# Altium PCB PCB1.PcbDoc
Units mm, origin at the board's own origin, x right, y up, seen from the top; angles counter-clockwise.
Board outline 89.92 x 60.07 mm, 2 copper layers (Top Layer, Bottom Layer); 73 components, 41 nets, 180 pads, 28 vias.
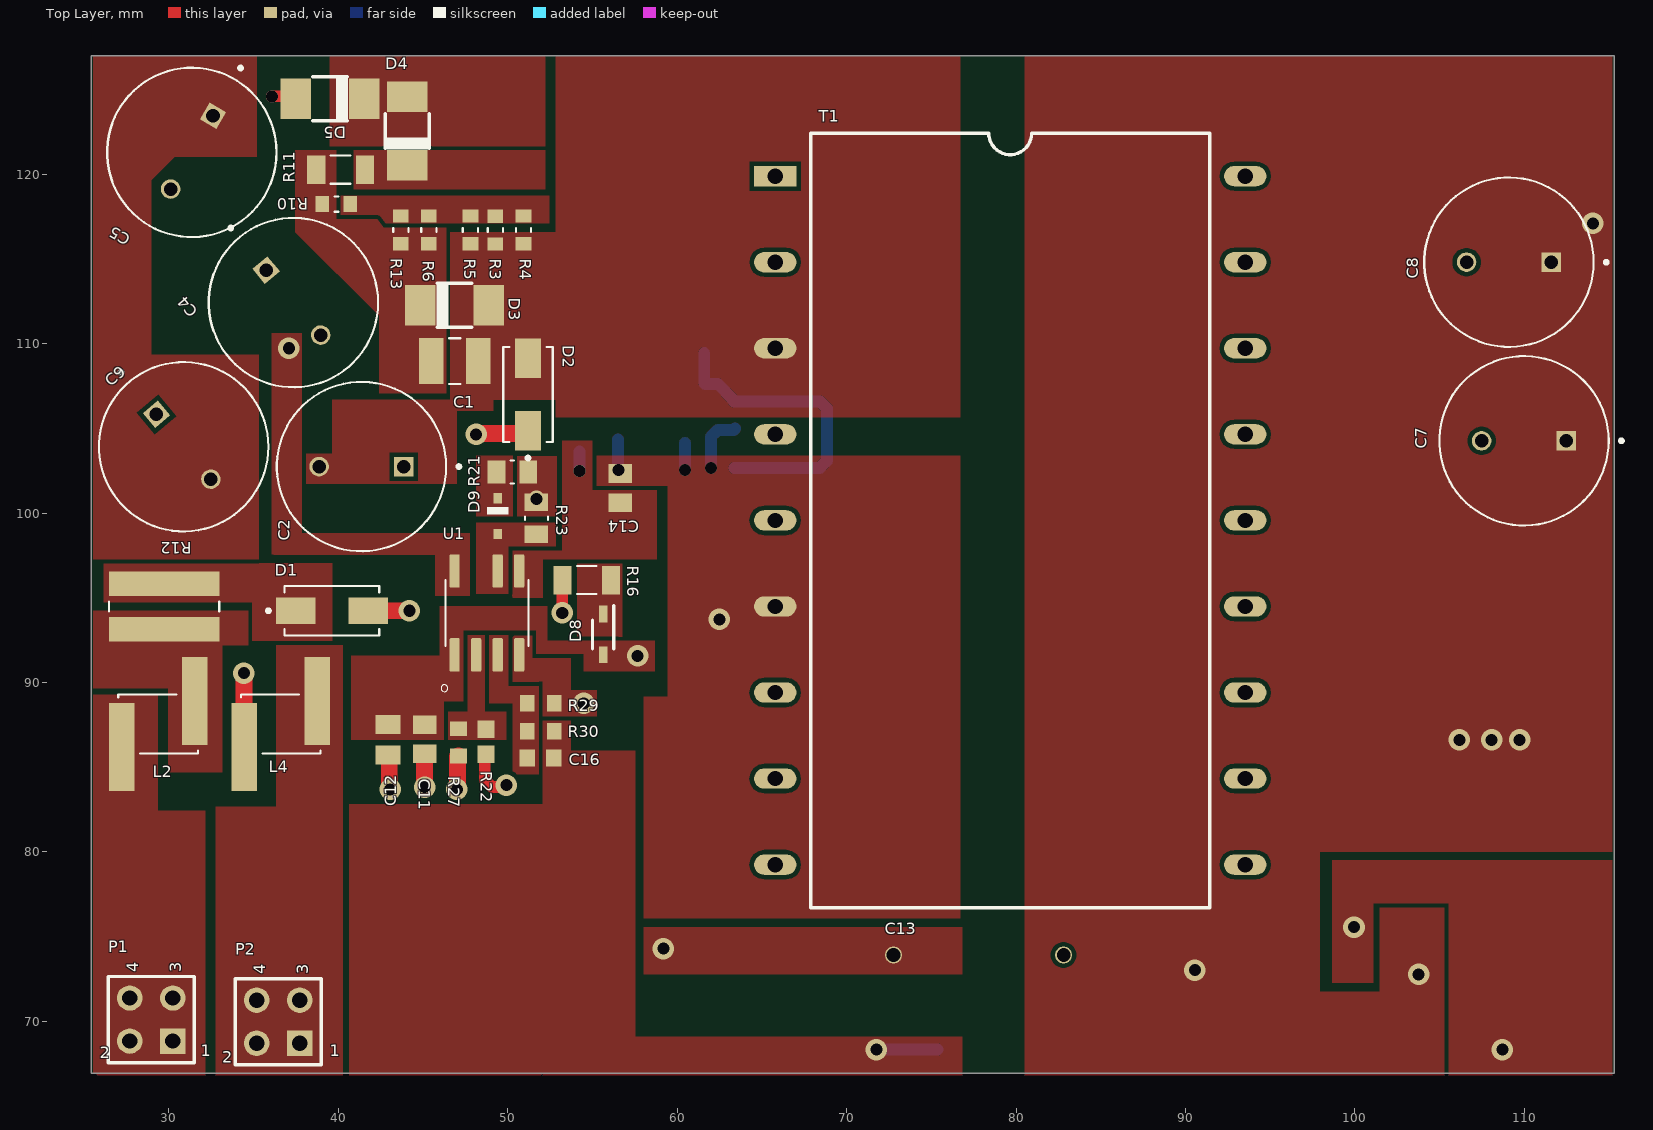
[diagram p0: Top Layer view]
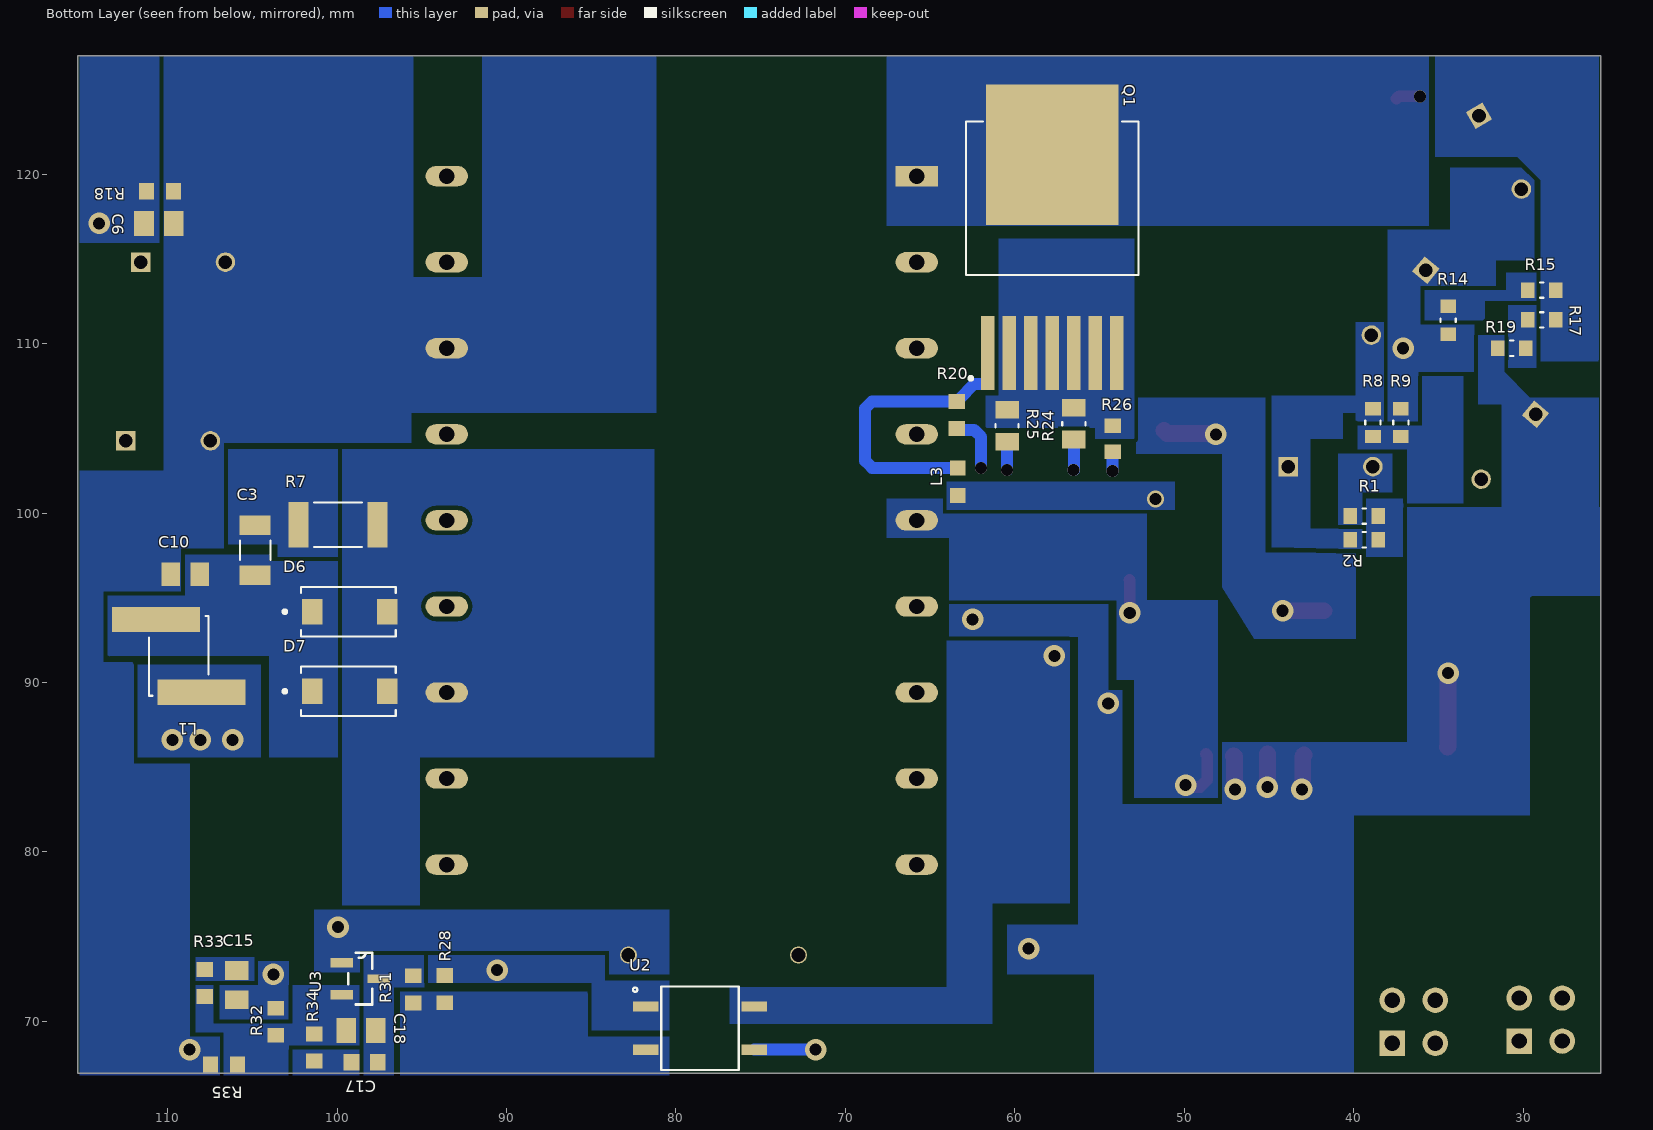
[diagram p1: Bottom Layer view, seen from below]

## Layer stack, top to bottom
Top Solder: solder mask 0.0102, Solder Resist, Dk 3.5
Top Layer: signal copper 0.0356
Dielectric 1: dielectric 0.32, FR-4, Dk 4.8
Bottom Layer: signal copper 0.0356
Bottom Solder: solder mask 0.0102, Solder Resist, Dk 3.5

## Board outline
115.316,127 115.316,66.929 25.4,66.929 25.4,127

## Design rules (kind name [scope] priority, off if disabled: settings)
Clearance [All] p1: gap=0.254 ignorepadtopadclearanceinfootprint=FALSE except(0: Arc-Hole Track-Hole SMDPad-Hole THPad-Hole Via-Hole Fill-Hole Poly-Hole Region-Hole Text-Hole)
PolygonConnect [All] p1: connectstyle=Direct reliefconductorwidth=0.254 reliefentries=4 polygonreliefangle="90 Angle" airgapwidth=0.254
RoutingVias [All] p1: holewidth=0.711 width=1.27 viastyle="Through Hole" minholewidth=0.711 minwidth=1.27 maxholewidth=0.711 maxwidth=1.27
SolderMaskExpansion [All] p1: expansion=0.102 istentingtop=FALSE
Width [All] p1: maxlimit=10 minlimit=0.254 preferedwidth=0.254 minimp=50.000000 maximp=50.000000 favimp=50.000000
30 further rules are at their usual default settings.

## Components (designator, comment, footprint, x,y, rotation, side; value= is the part's Value field where it differs from the comment)
C1 "0.033u 630v" "0.33u 630V c" 46.863,108.966 r0 top
C2 "15Uf" 15uf 41.344,102.766 r180 top
C3 "LEC017" LEC017 104.902,97.917 r270 bottom
C4 "15Uf" 15uf 37.338,112.395 r310 top
C5 "15Uf" 15uf 31.32,121.287 r240 top
C6 "1uF 50V" C-0805 110.617,117.094 r180 bottom
C7 "470uF 25V" "470uF 25V" 109.982,104.267 r180 top
C8 "470uF 25V" "470uF 25V" 109.093,114.808 r180 top
C9 "15Uf" 15uf 30.861,103.886 r310 top
C10 "GRM21BR71H105KA12L" CAPC2012X135N 108.966,96.393 r0 bottom
C11 "0.1u 25V" CAPC2012X135N 45.088,86.647 r270 top
C12 "4.7u 25V" "4.7u 25V" 42.926,86.614 r270 top
C13 "1000pF 20% 1.25kV" "CAP Fılm 1000pF 20% 450V" 73.533,73.914 r0 top
C14 "0.1u 25V" CAPC2012X135N 56.642,101.473 r90 top
C15 "0.1u 25V" CAPC2012X135N 105.918,72.136 r270 bottom
C16 "0.033uF 60V" C-0603 51.939,85.535 r0 top
C17 "0.033uF 50V" C-0603 98.364,67.577 r180 bottom
C18 "1000pF 50V 10%" C-0805 98.679,69.469 r180 bottom
D1 "S1M-13-F" S1M-13F 39.492,94.107 r0 top
D2 "S1M-13-F" S1M-13F 51.317,106.872 r90 top
D3 "P6SMB350A" P6SMB350A 46.863,112.395 r0 top
D4 "ES1M" ES1M 44.069,122.555 r90 top
D5 "ES1M" ES1M 39.497,124.46 r180 top
D6 "STPS3150UF" STPS3150UF 99.463,94.053 r180 bottom
D7 "STPS3150UF" STPS3150UF 99.463,89.354 r180 bottom
D8 "BAS21HT1" BAS21HT1 55.626,92.837 r270 top
D9 "75V 150mA" "75V 150mA" 49.403,99.822 r270 top
L1 "SDR0805-3R3ML" 8200uH 109.347,91.567 r270 bottom
L2 "8200uH" 8200uH 29.36,87.551 r180 top
L3 "Ferrite Bead 750ohm" "Ferrite Bead 750ohm" 63.373,101.854 r90 bottom
L4 "8200uH" 8200uH 36.601,87.551 r0 top
P1 "Header 2X2" HDR2X2 30.226,68.834 r90 top
P2 "Header 2X2" HDR2X2 37.719,68.707 r90 top
Q1 "1700V 5.3A mosfet" "1400V 5.3A Mosfet" 57.658,117.812 r180 bottom
R1 "2.2M R" 232K 39.37,99.949 r0 bottom
R2 "2.2M R" 232K 39.37,98.552 r0 bottom
R3 "232K r" 232K 49.139,116.7 r270 top
R4 "232K r" 232K 50.8,116.713 r270 top
R5 "232K r" 232K 47.667,116.714 r270 top
R6 "232K r" 232K 45.466,116.713 r90 top
R7 "LER022-2000" LER022 99.822,99.187 r0 bottom
R8 "2.2M R" 232K 38.989,105.341 r270 bottom
R9 "2.2M R" 232K 37.338,105.341 r270 bottom
R10 "232K r" 232K 39.878,118.11 r0 top
R11 "10ohm 5% 2/3W" "10 ohm %5" 40.005,120.269 r0 top
R12 "27R" 75R2W 29.845,94.488 r90 top
R13 "232K r" 232K 43.815,116.713 r90 top
R14 "2.2M R" 232K 34.544,111.379 r270 bottom
R15 "2.2M R" 232K 28.898,113.284 r0 bottom
R16 "LER010-2R2" LER010-2R2 54.653,95.918 r180 top
R17 "2.2M R" 232K 28.898,111.278 r180 bottom
R18 "10k ohm 1% 1/10W" "10k ohm 1%" 110.454,119.043 r0 bottom
R19 "2.2M R" 232K 30.665,109.855 r0 bottom
R20 "10k ohm 1% 1/10W" "10k ohm 1%" 63.373,105.791 r90 bottom
R21 "5.1ohm 1/8W" "5.1 ohm 1/8w" 50.273,102.553 r180 top
R22 "LER001-5152" LER001-5152 48.71,86.509 r270 top
R23 "10ohm 1/8w" "5.1 ohm 1/8w" 51.816,99.695 r90 top
R24 "3.9ohm 1% 1/8w" "5.1 ohm 1/8w" 56.388,105.283 r90 bottom
R25 "3.9ohm 1% 1/8w" "5.1 ohm 1/8w" 60.325,105.156 r90 bottom
R26 "LER001-1001" LER001-1001 54.229,104.394 r90 bottom
R27 "14k ohm 1% 1/10W" R-0603 47.087,86.467 r90 top
R28 "1k ohm 1% 1/4w" R-0603 93.654,71.902 r90 bottom
R29 "22k 1% ohm" R-0603 51.943,88.773 r180 top
R30 "196k 1% 1/10W" R-0603 51.943,87.122 r0 top
R31 "5.1k ohm 1%" R-0603 95.504,71.882 r270 bottom
R32 "17.4k ohm 1% 1/10W" R-0603 103.632,69.977 r90 bottom
R33 "1k ohm 1% 1/4w" R-0603 107.823,72.263 r90 bottom
R34 "0ohm 1/4w" R-0603 101.346,68.453 r270 bottom
R35 "4.53k ohm 1% 1/10w" R-0603 106.68,67.437 r180 bottom
T1 "E44220" E44220 65.786,119.888 r0 top
U1 "LEU577" LEU577 48.895,94.107 r90 top
U2 "5kV transistor" SOP-4 78.583,69.723 r180 bottom
U3 "TL431AQDBZR 2.5V" SOT95P237X112-3N 98.628,72.517 r180 bottom

## Footprints (in the part's own frame and the unit in brackets; to place one, negate y for a bottom-side part, rotate by r counter-clockwise, add the part's x,y. Pads: shape width x height; smd on the part's side, far side on the other; paste and mask are expansions set on the pad)
"0.33u 630V c" [mm]
  rect 1.45x2.72 smd: 1(-1.382,0) 2(1.382,0)
  silkscreen extent -0.34,-1.35 0.34,1.35
"4.7u 25V" [mm]
  rect 1.12x1.48 smd: 1(-0.907,0) 2(0.907,0)
"5.1 ohm 1/8w" [mm]
  rect 1.04x1.38 smd: 1(-0.94,0.127) 2(0.94,0.127)
  silkscreen extent -0.1,-0.55 0.1,0.81
"10 ohm %5" [mm]
  rect 1.08x1.68 smd: 1(-1.318,0) 2(1.572,0)
  silkscreen extent -0.45,-0.83 0.71,0.83
"10k ohm 1%" [mm]
  rect 0.87x0.98 smd: 1(-0.802,0.044) 2(0.798,0.044)
  body extent -0.8,-0.36 0.8,0.44, height 0.55
15uf [mm]
  round 1.15 hole 0.8: N(2.482,0.023)
  rect 1.15x1.15 hole 0.8: P(-2.518,0.023)
  silkscreen extent -5.87,-4.98 4.98,5.02
75R2W [mm]
  rect 1.44x6.52 smd: 1(-1.34,0.127) 2(1.34,0.127)
  silkscreen extent -0.3,-3.12 0.3,3.38
"75V 150mA" [mm]
  rect 0.6x0.5 smd: A(1.05,0) C(-1.05,0)
  silkscreen extent -0.53,-0.63 -0.1,0.63
232K [mm]
  rect 0.79x0.93 smd: 1(-0.82,0.127) 2(0.82,0.127)
  silkscreen extent -0.11,-0.32 0.11,0.58
"470uF 25V" [mm]
  round 1.15 hole 0.8: N(2.5,0)
  rect 1.15x1.15 hole 0.8: P(-2.5,0)
  silkscreen extent -5.85,-5 5,5
"1400V 5.3A Mosfet" [mm]
  rect 0.79x4.37 smd: 1(-3.937,-8.354) 2(-2.667,-8.354) 3(-1.397,-8.354) 4(-0.127,-8.354) 5(1.143,-8.354) 6(2.413,-8.354) 7(3.683,-8.354)
  rect 7.84x8.29 smd: 8(-0.127,3.346)
  silkscreen extent -5.22,-9.96 4.96,5.31
8200uH [mm]
  rect 1.5x5.2 smd: 1(-2.15,-1.35) 2(2.15,1.35)
  silkscreen extent -2.35,-1.75 2.35,1.75
BAS21HT1 [mm]
  rect 1x0.5 smd: 1(-1.2,0) 2(1.2,0)
  silkscreen extent -1.7,-0.63 0.85,0.63
C-0603 [mm]
  rect 0.92x0.98 smd: 1(-0.787,0.005) 2(0.763,0.005)
C-0805 [mm]
  rect 1.16x1.47 smd: 1(-0.785,-0.006) 2(0.965,-0.006)
"CAP Fılm 1000pF 20% 450V" [mm]
  round 1 hole 0.8: 1(-0.765,0) 2(9.271,0)
CAPC2012X135N [mm]
  rect 1.1x1.38 smd: 1(-0.863,0) 2(0.863,0)
  body extent -1,-0.63 1,0.62, height 0.72
E44220 [mm]
  rect 2.5x1.2 hole 0.9: 0(0,0)
  oval 2.5x1.2 hole 0.9: 1(0,-5.08) 2(0,-10.16) 3(0,-15.24) 4(0,-20.32) 5(0,-25.4) 6(0,-30.48) 7(0,-35.56) 8(0,-40.64) 9(27.74,0) 10(27.74,-5.08) 11(27.74,-10.16) 12(27.74,-15.24) 13(27.74,-20.32) 14(27.74,-25.4) 15(27.74,-30.48) 16(27.74,-35.56) 17(27.74,-40.64)
  silkscreen extent 2.08,-43.18 25.66,2.54
ES1M [mm]
  rect 1.8x2.4 smd: A(2.025,0) C(-2.025,0)
  silkscreen extent -1.06,-1.3 1.02,1.3
"Ferrite Bead 750ohm" [mm]
  rect 0.89x0.93 smd: 1(-0.814,0) 2(0.814,0)
HDR2X2 [mm] "Connector; Header; 2x2 Position"
  rect 1.5x1.5 hole 0.9: 1(0,0)
  round 1.5 hole 0.9: 2(0,2.54) 3(2.54,0) 4(2.54,2.54)
  silkscreen extent -1.27,-1.27 3.81,3.81
LEC017 [mm]
  rect 1.16x1.82 smd: 1(-1.367,0.061) 2(1.583,0.061)
  silkscreen extent -0.46,-0.84 0.68,0.96
LER001-1001 [mm]
  rect 0.86x0.98 smd: 1(-0.765,0) 2(0.765,0)
LER001-5152 [mm]
  rect 1.04x1.02 smd: 1(-0.735,0) 2(0.735,0)
LER010-2R2 [mm]
  rect 1.07x1.68 smd: 1(-1.43,-0.127) 2(1.43,-0.127)
  silkscreen extent -0.57,-0.96 0.57,0.7
LER022 [mm]
  rect 1.2x2.67 smd: 1(-2.208,-0.127) 2(2.462,-0.127)
  silkscreen extent -1.29,-1.45 1.55,1.19
LEU577 [mm]
  rrect25% 1.97x0.6 smd: 1(-2.475,2.032) 2(-2.475,0.762) 3(-2.475,-0.508) 4(-2.475,-1.778) 5(2.475,-1.778) 6(2.475,-0.508) 7(2.475,2.032)
  silkscreen extent -4.64,-2.32 1.95,2.83
P6SMB350A [mm]
  rect 1.8x2.4 smd: A(2.025,-0.127) C(-2.025,-0.127)
  silkscreen extent -1.06,-1.43 1.02,1.17
R-0603 [mm]
  rect 0.87x0.98 smd: 1(-0.8,0) 2(0.8,0)
S1M-13F [mm]
  rect 2.33x1.55 smd: A(2.262,0.127) C(-2.008,0.127)
  silkscreen extent -3.72,-1.33 2.92,1.59
SOP-4 [mm]
  rect 1.5x0.6 smd: 1(-3.205,1.143) 2(-3.205,-1.397) 3(3.205,-1.397) 4(3.205,1.143)
  silkscreen extent -3.95,-2.59 2.28,2.33
SOT95P237X112-3N [mil]
  rect 52x22 smd: 1(-43,37) 2(-43,-37)
  rect 52x20 smd: 3(43,0)
  silkscreen extent -28,-60 28,60
STPS3150UF [mm]
  rect 1.2x1.52 smd: A(2.413,0.127) C(-2.008,0.127)
  silkscreen extent -3.72,-1.33 2.92,1.59

## Part data
C10: "SMD Capacitor X7R(EIA) with Capacitance: 1.0uF Tol. 10%. Rated Voltage: 50Vdc", Package="0805 Murata", Availability=Warning, Check_prices=https://www.snapeda.com/parts/GRM21BR71H105KA12L/Murata%20Electronics%20North%20America/view-part/78633/?ref=eda, MF=Murata, MP=GRM21BR71H105KA12L, Price=None, SnapEDA_Link=https://www.snapeda.com/parts/GRM21BR71H105KA12L/Murata%20Electronics%20North%20America/view-part/78633/?ref=snap
P1 P2: "Header, 2-Pin, Dual row", LatestRevisionDate=17-Jul-2002, LatestRevisionNote="Re-released for DXP Platform.", Publisher="Altium Limited"

## Via types
v1: diameter 1.27, hole 0.711, Top Layer to Bottom Layer, 22 vias
v2: diameter 0.711, hole 0.711, Top Layer to Bottom Layer, 5 vias
v3: diameter 1, hole 0.711, Top Layer to Bottom Layer, 1 vias

## Nets (pads, with @x,y where several pads share a name; then routed paths per layer and width w, separated by ;. In a path a pad name is that pad's centre, name@x,y a point inside that pad or via, vN(x,y) a via of type N, cw(c..) or ccw(c..) an arc to the next point about the centre after c; other vN are vias at no path point)
CS1: Q1.2 Q1.3 Q1.4 Q1.5 Q1.6 Q1.7 R24.2 R25.2 R26.2
GND: C6.2 C7.N C8.N C10.2 C13.2 R18.1 R35.1 T1.11 U3.1
  other v1: 108.712,68.326 99.949,75.565
NetC1_1: C1.1 D3.C R6.1 R10.1 R11.1 R13.1
NetC2_P: C2.P C4.N R2.2 R8.1
NetC3_1: C3.1 R7.2
NetC3_2: C3.2 C10.1 D6.C D7.C L1.1
NetC4_P: C4.P C5.N R9.1 R14.2 U1.7
  other v1: 37.084,109.728
NetC5_P: C5.P C9.N R15.1 R17.2
NetC11_1: C11.1 C12.1 D8.2 U1.1 U2.4
  other v1: 57.658,91.567
NetC14_1: C14.1 R26.1 U1.5 | length 1.1
  Bottom Layer w0.7: v2(54.229,102.489) R26.1
NetC15_1: C15.1 R33.2
NetC16_1: C16.1 R29.2 R30.1 U1.3
NetC16_2: C16.2 R30.2 U2.3 | length 3.6
  Bottom Layer w0.7: v1(71.755,68.326) U2.3
NetC17_1: C17.1 R34.2
NetC17_2: C17.2 C18.2 R31.1 U3.3
NetC18_1: C18.1 R32.1 R33.1 R34.1 R35.2 U3.2
NetD1_A: D1.A D2.C | length 5.6
  Top Layer w1: D1.A v1(44.196,94.234) ; v1(48.133,104.648) 48.185,104.7 51.025,104.7 D2.C
NetD1_C: D1.C R12.2
NetD4_A: D4.A D5.C
NetD4_C: D4.C R11.2
NetD5_A: D5.A Q1.8 T1.0 | length 1.4
  Top Layer w0.7: v2(36.085,124.601) 37.331,124.601 D5.A
NetD6_A: D6.A D7.A R7.1 T1.15
NetD8_1: D8.1 R16.1
NetD9_A: D9.A R23.1 U1.6
NetD9_C: D9.C R21.2
NetL2_1: L2.1 R12.1
NetL2_2: L2.2 P1.1 P1.2 P1.3 P1.4
NetL3_1: L3.1 R21.1 R23.2 | length 0.2
  Top Layer w0.254: R23.2 v3(51.689,100.838)
NetL3_2: L3.2 Q1.1 R20.2 | length 18.4
  Bottom Layer w0.7: Q1.1 61.595,107.668 61.64,107.623 62.383,107.623 63.277,106.729 63.277,106.674 63.362,106.589 68.424,106.589 68.834,106.179 68.834,103.078 68.424,102.668 L3.2
NetL4_2: L4.2 P2.1 P2.2 P2.3 P2.4
NetR1_1: R1.1 R2.1
NetR3_1: R3.1 R4.1 R5.1 R6.2 R10.2 R13.2
NetR8_2: R8.2 R9.2
NetR14_1: R14.1 R15.2
NetR16_2: R16.2 R22.2 T1.4 | length 5
  Top Layer w0.7: R22.2 48.641,85.705 48.641,84.248 49.051,83.838 49.802,83.838 v1(49.911,83.947) ; v1(53.213,94.107) 53.218,94.112 53.218,96.04 R16.2
NetR17_1: R17.1 R19.1
NetR22_1: R22.1 R27.2 U1.2
NetR28_1: R28.1 R31.2 U2.2
P: C9.P C11.2 C12.2 C13.1 C14.2 L4.1 R19.2 R20.1 R24.1 R25.1 R27.1 R29.1 T1.5 U1.4 | length 17.3
  Top Layer w1: v1(34.417,90.551) 34.434,90.534 34.434,86.217 L4.1 ; C12.2 42.941,85.707 43.001,85.647 43.001,83.745 v1(43.053,83.693) ; v1(45.085,83.82) 45.086,83.821 C11.2 C11.2 ; v1(46.99,83.693) 47.042,83.745 47.042,85.622 R27.1
  Bottom Layer w0.7: R24.1 56.515,102.543 56.525,102.533 v2(56.525,102.53) ; R25.1@60.452,104.14 60.46,104.132 60.46,102.532 v2(60.462,102.53) ; v2(61.986,102.657) 61.986,104.492 62.398,104.904 63.332,104.904 R20.1
  other v1: 59.182,74.295 54.483,88.773 62.484,93.726
P_DC+: C1.2 C2.N D2.A D3.A R1.2 R3.2 R4.2 R5.2 T1.2
S_12V: C6.1 C7.P C8.P C15.2 L1.2 R18.2 R28.2 R32.2 U2.1
  other v1: 103.759,72.771 90.551,73.025 106.172,86.614 108.077,86.614 109.728,86.614 114.046,117.094
pads on no net: T1.1 T1.3 T1.6 T1.7 T1.8 T1.9 T1.10 T1.12 T1.13 T1.14 T1.16 T1.17

## Polygon pours and split planes (outlines as drawn)
S_12V on Bottom Layer "S_12V_L02_P080" (solid, pour order 80): 115.189,115.951 110.49,115.951 110.49,127 115.189,127
GND on Bottom Layer "GND_L02_P078" (solid, pour order 78): 109.22,97.536 109.22,97.917 106.68,97.917 106.68,104.14 95.631,104.14 95.631,105.918 81.15,105.918 81.15,122.298 81.15,127 91.44,127 91.44,113.919 95.504,113.919 95.504,127 110.236,127 110.236,102.489 115.189,102.489 115.189,66.802 108.712,66.802 108.712,85.217 112.014,85.217 112.014,91.186 113.792,91.186 113.792,95.377 109.093,95.377 109.093,97.536
NetC3_1 on Bottom Layer "NETC3_1_L02_P077" (solid, pour order 77): 99.949,103.759 99.949,97.409 103.505,97.409 103.505,98.171 106.426,98.171 106.426,103.759
NetD6_A on Bottom Layer "NETD6_A_L02_P076" (solid, pour order 76): 81.28,85.598 95.123,85.598 95.123,76.835 99.695,76.835 99.695,103.759 81.28,103.759
NetC3_2 on Bottom Layer "NETC3_2_L02_P075" (solid, pour order 75): 104.013,97.155 104.013,97.536 108.966,97.536 108.966,95.123 113.538,95.123 113.538,91.44 113.411,91.567 104.013,91.567 104.013,85.598 99.949,85.598 99.949,97.155
S_12V on Bottom Layer "S_12V_L02_P074" (solid, pour order 74): 111.76,91.059 111.76,85.598 104.521,85.598 104.521,91.059
NetC15_1 on Bottom Layer "NETC15_1_L02_P073" (solid, pour order 73): 108.331,72.39 104.902,72.39 104.902,73.787 108.331,73.787
GND on Bottom Layer "GND_L02_P072" (solid, pour order 72): 106.934,69.088 106.934,66.802 109.474,66.802 109.474,69.088
S_12V on Bottom Layer "S_12V_L02_P068" (solid, pour order 68): 102.87,72.136 102.87,73.533 104.648,73.533 104.648,72.136 106.934,72.136 106.934,70.104 102.743,70.104 102.743,72.136
NetC18_1 on Bottom Layer "NETC18_1_L02_P067" (solid, pour order 67): 106.68,69.342 108.331,69.342 108.331,72.136 107.315,72.136 107.315,69.85 102.616,69.85 102.616,72.136 98.552,72.136 98.552,68.58 102.87,68.58 102.87,66.802 106.68,66.802
NetC17_1 on Bottom Layer "NETC17_1_L02_P066" (solid, pour order 66): 98.552,68.326 98.552,66.802 102.616,66.802 102.616,68.326
NetC17_2 on Bottom Layer "NETC17_2_L02_P065" (solid, pour order 65): 94.869,73.914 94.869,72.009 96.647,72.009 96.647,66.802 98.425,66.802 98.425,73.914
GND on Bottom Layer "GND_L02_P064" (solid, pour order 64): 83.947,72.771 80.391,72.771 80.391,76.581 101.346,76.581 101.346,72.771 101.219,72.898 98.679,72.898 98.679,74.168 83.947,74.168
S_12V on Bottom Layer "S_12V_L02_P063" (solid, pour order 63): 80.391,69.469 84.963,69.469 84.963,72.263 94.615,72.263 94.615,73.914 84.201,73.914 84.201,72.39 80.391,72.39
NetR28_1 on Bottom Layer "NETR28_1_L02_P062" (solid, pour order 62): 80.391,69.088 80.391,66.802 96.266,66.802 96.266,71.755 85.217,71.755 85.217,69.088
NetD5_A on Bottom Layer "NETD5_A_L02_P061" (solid, pour order 61): 35.56,127 35.56,116.967 67.564,116.967 67.564,127
CS1 on Bottom Layer "CS1_L02_P059" (solid, pour order 59): 61.722,105.029 61.722,106.934 60.96,106.934 60.96,116.205 52.959,116.205 52.959,105.029
NetL3_1 on Bottom Layer "NETL3_1_L02_P057" (solid, pour order 57): 64.008,101.854 64.008,100.203 50.546,100.203 50.546,101.854
NetC11_1 on Bottom Layer "NETC11_1_L02_P055" (solid, pour order 55): 56.769,92.456 56.769,76.962 61.341,76.962 61.341,69.85 76.835,69.85 76.835,72.009 64.008,72.009 64.008,92.456
NetR16_2 on Bottom Layer "NETR16_2_L02_P053" (solid, pour order 53): 52.197,94.869 63.881,94.869 63.881,98.552 67.564,98.552 67.564,100.838 64.262,100.838 64.262,99.949 52.197,99.949 52.197,97.155
P on Bottom Layer "P_L02_P044" (solid, pour order 44): 54.483,89.535 54.483,94.742 63.881,94.742 63.881,92.71 56.261,92.71 56.261,89.535 56.261,75.692 60.452,75.692 60.452,72.771 55.308,72.771 55.308,66.929 40.005,66.929 40.005,82.804 53.657,82.804 53.657,89.535
NetR16_2 on Bottom Layer "NETR16_2_L02_P048" (solid, pour order 48): 52.197,94.869 53.975,94.869 53.975,90.17 52.959,90.17 52.959,83.185 48.006,83.185 48.006,94.869
NetD1_A on Bottom Layer "NETD1_A_L02_P037" (solid, pour order 37): 39.878,92.583 45.876,92.583 47.752,95.631 47.752,97.536 47.752,103.505 52.832,103.505 52.832,106.68 52.705,106.807 46.736,106.807 45.212,106.807 45.212,97.663 39.878,97.663
NetC2_P on Bottom Layer "NETC2_P_L02_P033" (solid, pour order 33): 39.878,106.934 44.831,106.934 44.831,104.394 40.64,104.394 40.64,105.918 39.878,105.918
NetC2_P on Bottom Layer "NETC2_P_L02_P032" (solid, pour order 32): 39.497,99.06 39.497,97.853 44.831,97.987 44.831,104.521 42.545,104.521 42.545,99.06
P_DC+ on Bottom Layer "P_DC+_L02_P031" (solid, pour order 31): 37.719,103.505 37.719,101.219 39.497,101.219 39.497,99.314 40.894,99.314 40.894,103.505
NetR1_1 on Bottom Layer "NETR1_1_L02_P030" (solid, pour order 30): 39.243,100.838 39.243,97.409 37.084,97.409 37.084,100.838
NetC2_P on Bottom Layer "NETC2_P_L02_P028" (solid, pour order 28): 38.1,111.252 38.1,105.41 39.878,105.41 39.878,111.252
NetC4_P on Bottom Layer "NETC4_P_L02_P026" (solid, pour order 26): 37.973,108.839 36.195,108.839 36.195,105.41 37.973,105.41
NetR8_2 on Bottom Layer "NETR8_2_L02_P025" (solid, pour order 25): 36.83,103.759 36.83,100.457 33.528,100.457 33.528,108.077 35.941,108.077 35.941,105.156 39.751,105.156 39.751,103.759
P on Bottom Layer "P_L02_P020" (solid, pour order 20): 47.752,82.169 47.752,86.487 36.83,86.487 36.83,100.33 25.4,100.33 25.4,95.123 29.464,95.123 29.591,94.996 29.591,82.169
CS1 on Bottom Layer "CS1_L02_P015" (solid, pour order 15): 57.404,106.934 57.404,105.283 55.245,105.283 55.245,104.394 52.959,104.394 52.959,106.934
NetC4_P on Bottom Layer "NETC4_P_L02_P014" (solid, pour order 14): 34.29,113.411 31.623,113.411 31.623,114.935 29.337,114.935 29.337,119.634 30.099,120.396 34.29,120.396
NetC4_P on Bottom Layer "NETC4_P_L02_P013" (solid, pour order 13): 32.893,111.125 32.893,108.331 37.973,108.331 37.973,116.713 34.163,116.713 34.163,113.411 36.068,113.411 36.068,113.284 36.068,111.125
NetR14_1 on Bottom Layer "NETR14_1_L02_P012" (solid, pour order 12): 29.083,114.173 29.083,112.522 32.258,112.522 32.258,111.506 32.385,111.379 35.814,111.379 35.814,113.157 30.988,113.157 30.988,114.173
P on Bottom Layer "P_L02_P003" (solid, pour order 3): 31.115,110.49 31.115,108.331 29.591,106.807 25.527,106.807 25.527,97.663 31.496,97.663 31.242,97.917 31.242,106.426 32.639,106.426 32.639,110.49
NetR17_1 on Bottom Layer "NETR17_1_L02_P002" (solid, pour order 2): 29.21,112.268 29.21,108.585 30.861,108.585 30.861,112.268
NetC5_P on Bottom Layer "NETC5_P_L02_P000" (solid, pour order 0): 35.179,127 35.179,121.031 30.353,121.031 28.956,119.634 28.956,108.966 25.4,108.966 25.527,109.093 25.527,127
S_12V on Top Layer "S_12V_L01_P079" (solid, pour order 79): 80.518,87.503 80.518,127 115.189,127 115.189,87.503
GND on Top Layer "GND_L01_P071" (solid, pour order 71): 101.092,72.263 98.679,72.263 98.679,79.502 100.838,79.502 100.965,79.502 101.346,79.502 101.346,72.263 101.346,79.502 115.189,79.502 115.189,66.802 105.537,66.802 105.537,76.962 101.092,76.962
S_12V on Top Layer "S_12V_L01_P070" (solid, pour order 70): 80.518,87.503 104.521,87.503 104.521,90.932 104.394,91.059 115.189,91.059 115.189,80.01 97.917,80.01 97.917,76.708 97.917,71.755 101.473,71.755 101.473,76.708 105.283,76.708 105.283,66.802 80.518,66.802
P_DC+ on Top Layer "P_DC+_L01_P060" (solid, pour order 60): 76.708,127 76.708,105.664 52.832,105.664 52.832,127
NetC14_1 on Top Layer "NETC14_1_L01_P058" (solid, pour order 58): 53.213,101.092 53.213,104.267 54.991,104.267 54.991,101.092
P on Top Layer "P_L01_P056" (solid, pour order 56): 63.373,103.378 76.708,103.378 76.708,90.932 76.708,76.073 58.039,76.073 58.039,89.154 59.436,89.154 59.436,101.6 55.245,101.6 55.245,103.378
NetD8_1 on Top Layer "NETD8_1_L01_P054" (solid, pour order 54): 54.102,92.71 54.102,97.028 56.769,97.028 56.769,92.71
P on Top Layer "P_L01_P052" (solid, pour order 52): 58.039,75.565 58.039,72.771 76.835,72.771 76.835,75.565
NetC16_2 on Top Layer "NETC16_2_L01_P051" (solid, pour order 51): 52.07,66.929 51.943,66.802 40.64,66.802 40.64,82.804 52.07,82.804 52.07,85.979 57.531,85.979 57.531,69.088 76.835,69.088 76.835,66.802 52.07,66.802
NetC16_2 on Top Layer "NETC16_2_L01_P050" (solid, pour order 50): 52.07,87.757 52.07,84.709 53.721,84.709 53.721,87.757
NetC11_1 on Top Layer "NETC11_1_L01_P049" (solid, pour order 49): 45.974,92.075 45.974,94.488 52.324,94.488 52.324,92.456 58.674,92.456 58.674,90.678 54.483,90.678 54.483,91.694 51.689,91.694 51.689,93.091 47.371,93.091 47.371,92.075
NetC14_1 on Top Layer "NETC14_1_L01_P047" (solid, pour order 47): 50.165,97.79 50.165,94.996 52.07,94.996 52.07,97.282 58.801,97.282 58.801,101.346 53.213,101.346 53.213,97.79
NetL3_1 on Top Layer "NETL3_1_L01_P046" (solid, pour order 46): 52.899,103.359 52.899,99.749 52.826,99.822 50.546,99.822 50.546,103.359
P on Top Layer "P_L01_P045" (solid, pour order 45): 55.245,89.535 55.245,88.011 55.118,88.011 52.578,88.011 52.578,89.535
P on Top Layer "P_L01_P043" (solid, pour order 43): 50.19,92.765 50.165,92.74 50.165,90.043 52.07,90.043 52.07,88.011 53.721,88.011 53.721,91.44 51.435,91.44 51.435,92.747
NetC16_1 on Top Layer "NETC16_1_L01_P042" (solid, pour order 42): 48.903,92.777 48.903,88.781 50.292,88.773 50.292,84.582 51.816,84.582 51.816,89.789 50.038,89.789 50.038,92.777
NetR22_1 on Top Layer "NETR22_1_L01_P041" (solid, pour order 41): 47.625,92.781 47.625,88.011 48.641,88.011 48.641,92.781
NetR22_1 on Top Layer "NETR22_1_L01_P039" (solid, pour order 39): 46.355,88.265 46.355,86.614 49.911,86.614 49.911,88.265
NetC11_1 on Top Layer "NETC11_1_L01_P038" (solid, pour order 38): 40.767,86.614 46.228,86.614 46.228,88.9 47.371,88.9 47.371,92.837 45.974,92.837 45.974,91.567 40.767,91.567
NetD9_C on Top Layer "NETD9_C_L01_P036" (solid, pour order 36): 50.292,103.378 50.292,99.822 48.133,99.822 48.133,103.378
NetC4_P on Top Layer "NETC4_P_L01_P035" (solid, pour order 35): 37.846,110.617 36.068,110.617 36.068,97.409 36.195,97.536 45.72,97.536 45.72,95.123 47.752,95.123 47.752,98.806 37.846,98.806
P_DC+ on Top Layer "P_DC+_L01_P034" (solid, pour order 34): 39.624,103.505 38.1,103.505 38.1,101.727 46.99,101.727 46.99,106.045 49.149,106.045 49.149,107.95 46.736,107.95 46.609,107.823 46.609,106.68 39.624,106.68
NetL2_2 on Top Layer "NETL2_2_L01_P024" (solid, pour order 24): 32.131,66.802 32.131,82.423 29.337,82.423 29.337,89.281 25.527,89.281 25.527,66.802
NetL4_2 on Top Layer "NETL4_2_L01_P021" (solid, pour order 21): 40.259,66.802 32.766,66.802 32.766,82.677 40.259,82.677 40.259,92.202 36.322,92.202 36.322,82.677 40.259,82.677
NetD1_C on Top Layer "NETD1_C_L01_P019" (solid, pour order 19): 26.162,97.028 26.162,94.742 34.925,94.742 34.925,92.456 39.624,92.456 39.624,97.028
NetL2_1 on Top Layer "NETL2_1_L01_P018" (solid, pour order 18): 25.527,94.234 25.527,89.662 29.972,89.662 29.972,84.582 30.099,84.709 33.147,84.709 33.147,92.202 34.671,92.202 34.671,94.234
NetD9_A on Top Layer "NETD9_A_L01_P016" (solid, pour order 16): 50.038,98.044 52.832,98.044 52.832,99.441 48.133,99.441 48.133,95.25 50.038,95.25
NetC5_P on Top Layer "NETC5_P_L01_P001" (solid, pour order 1): 35.179,127 35.179,121.031 30.353,121.031 28.956,119.634 28.956,108.966 25.4,108.966 25.527,109.093 25.527,127
P_DC+ on Top Layer "P_DC+_L01_P011" (solid, pour order 11): 46.609,116.586 46.609,106.68 52.832,106.68 52.832,116.586
NetR3_1 on Top Layer "NETR3_1_L01_P010" (solid, pour order 10): 40.005,118.745 40.005,117.475 42.418,117.475 42.799,117.094 52.451,117.094 52.451,118.745
NetC1_1 on Top Layer "NETC1_1_L01_P009" (solid, pour order 9): 46.355,107.061 42.418,107.061 42.418,111.633 37.465,116.586 37.465,117.348 42.291,117.348 42.672,116.84 46.355,116.84
NetC1_1 on Top Layer "NETC1_1_L01_P008" (solid, pour order 8): 39.878,117.094 37.465,117.094 37.465,121.412 39.878,121.412
NetD4_C on Top Layer "NETD4_C_L01_P007" (solid, pour order 7): 52.197,119.126 40.894,119.126 40.894,121.539 52.197,121.539
NetD4_A on Top Layer "NETD4_A_L01_P006" (solid, pour order 6): 39.497,127 39.497,121.666 52.197,121.666 52.197,127
NetC5_P on Top Layer "NETC5_P_L01_P005" (solid, pour order 5): 35.306,97.282 35.306,109.347 25.527,109.347 25.527,97.282 29.337,97.282

## Text inside footprints (layer, text, board x,y; h text height)
P1: Top Overlay "1" at 31.877,67.945 h0.7; Top Overlay "2" at 25.908,67.818 h0.7; Top Overlay "4" at 28.194,72.898 h0.7 r90; Top Overlay "3" at 30.734,72.898 h0.7 r90
P2: Top Overlay "1" at 39.497,67.945 h0.7; Top Overlay "2" at 33.147,67.564 h0.7; Top Overlay "4" at 35.687,72.771 h0.7 r90; Top Overlay "3" at 38.227,72.771 h0.7 r90